# Altium PCB BLDC_Motor Controller.PcbDoc
Units mm, origin at the board's own origin, x right, y up, seen from the top; angles counter-clockwise.
Board outline 100 x 75 mm, 4 copper layers (F.Cu, In1.Cu, In2.Cu, B.Cu); 179 components, 160 nets, 651 pads, 138 vias.
Unrouted connection lines stored in the file: 403.
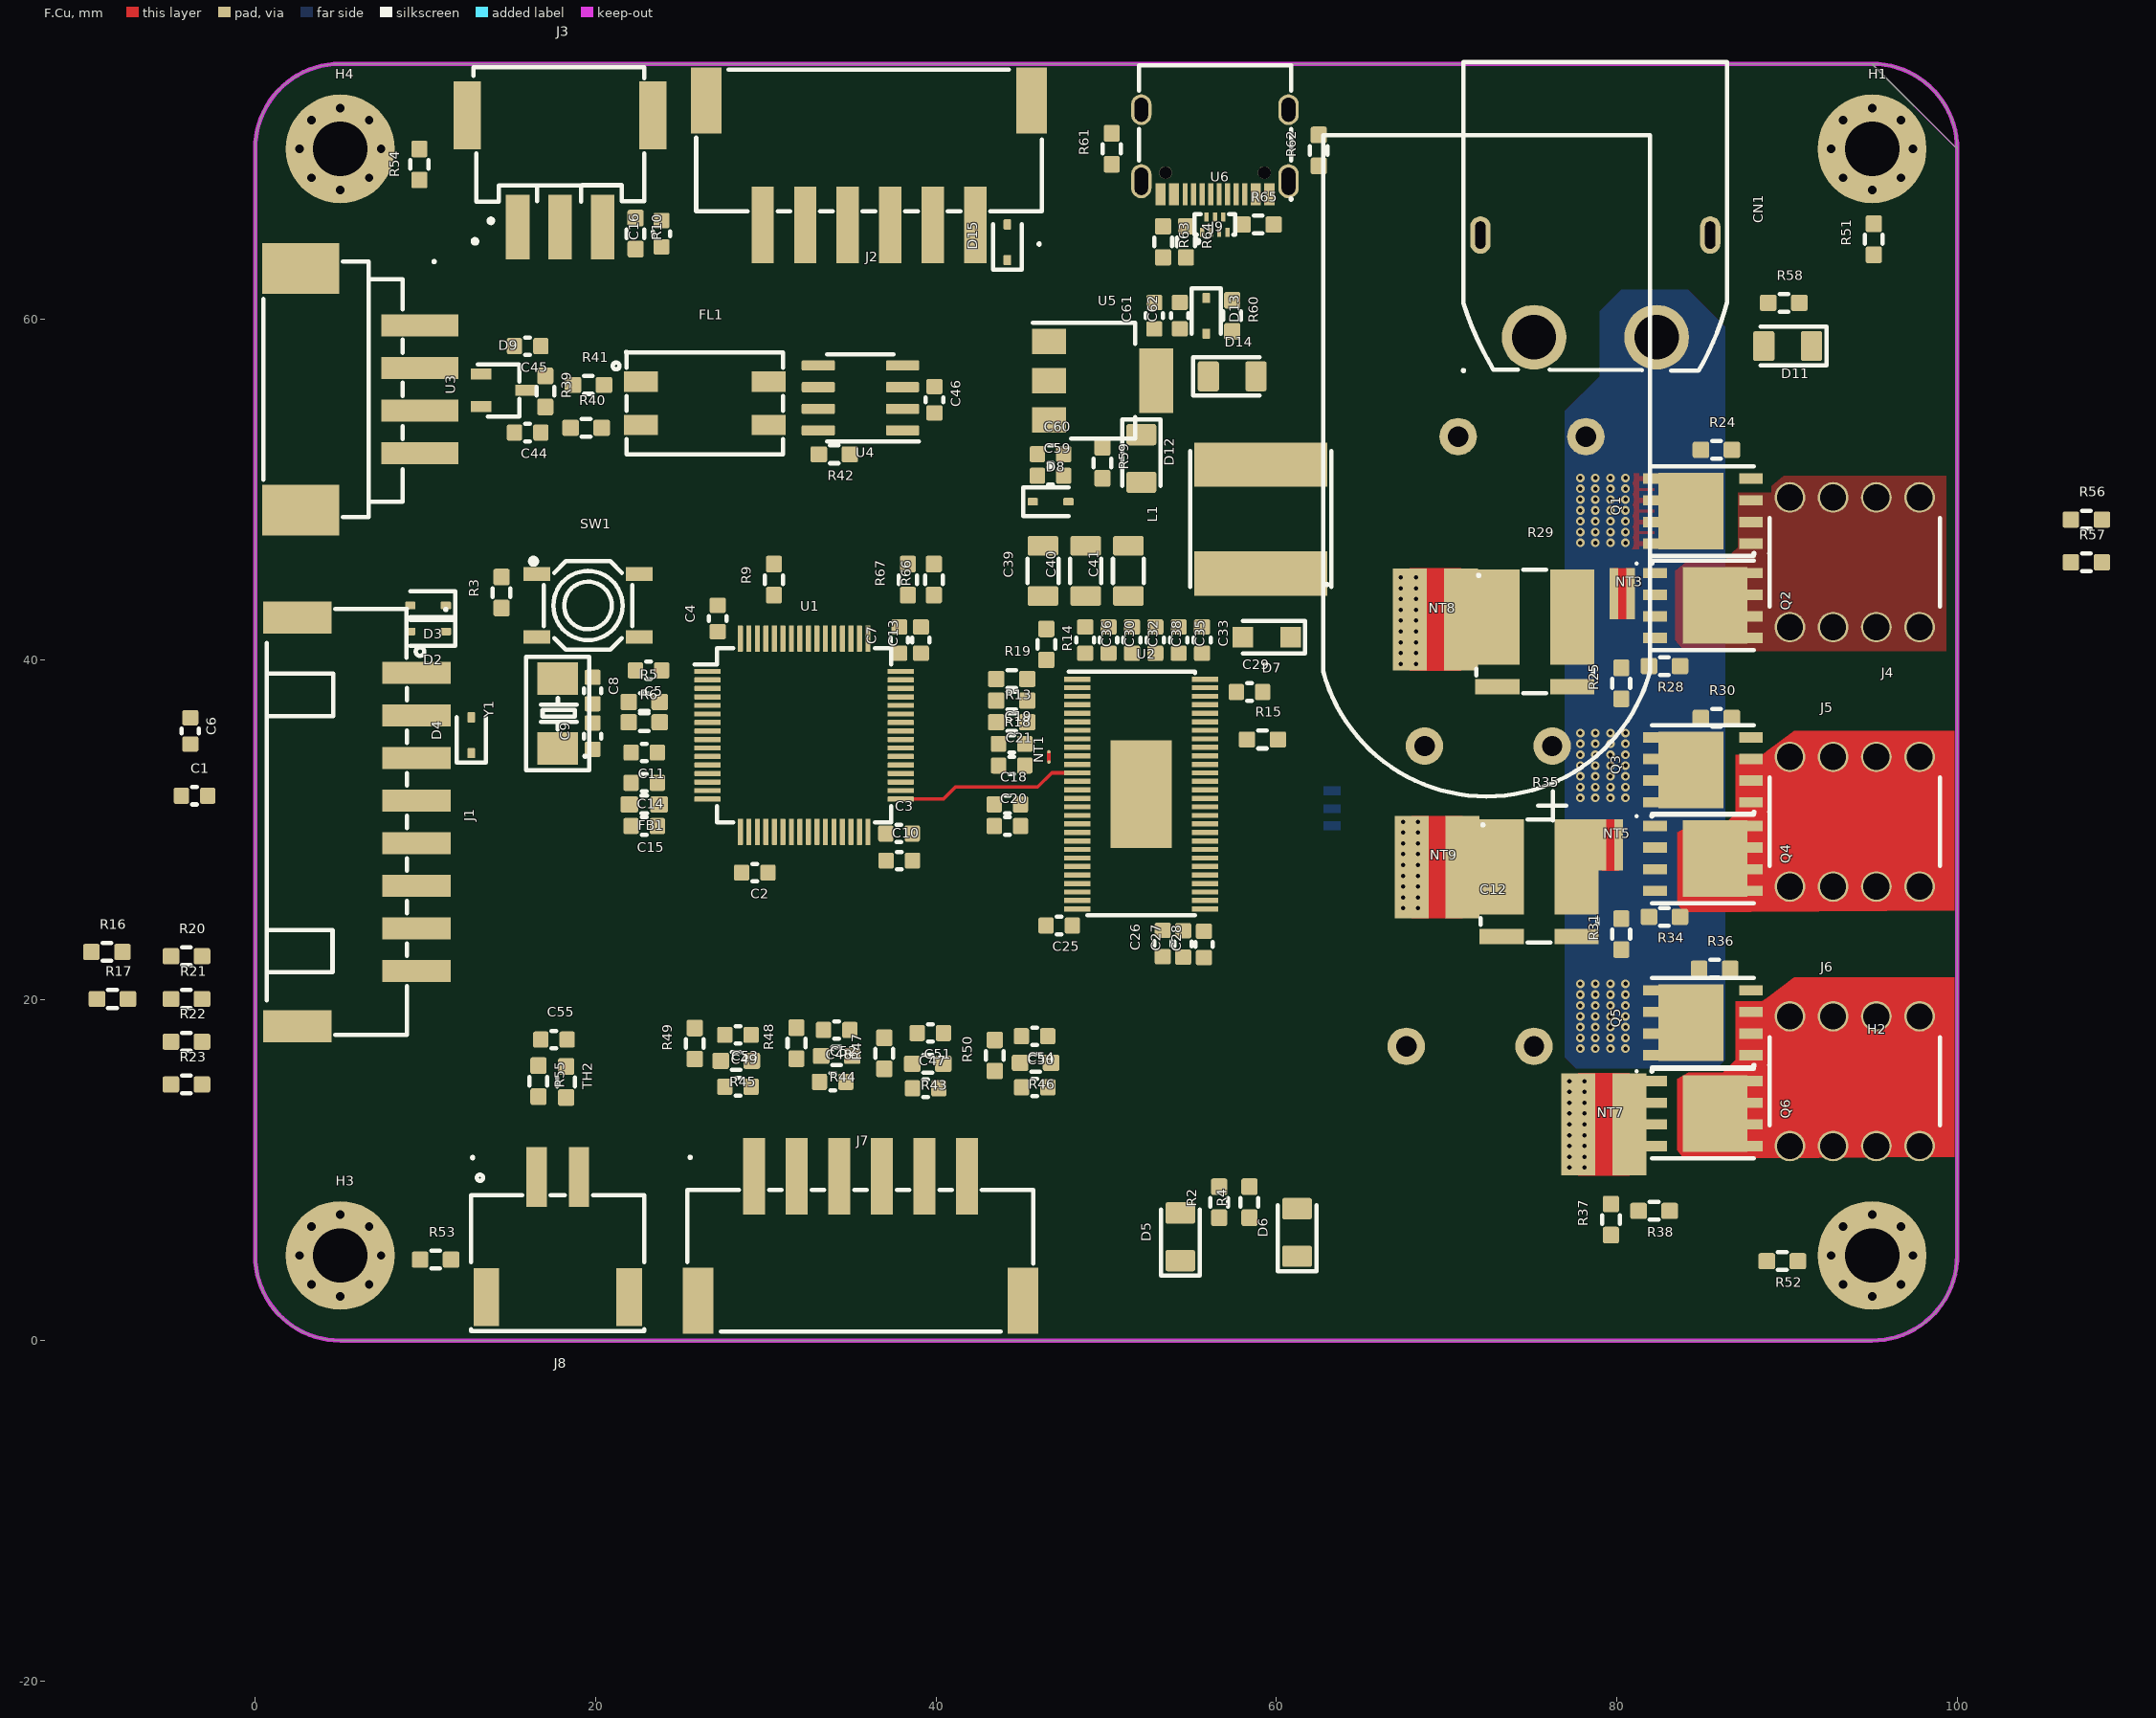
[diagram p0: F.Cu view]
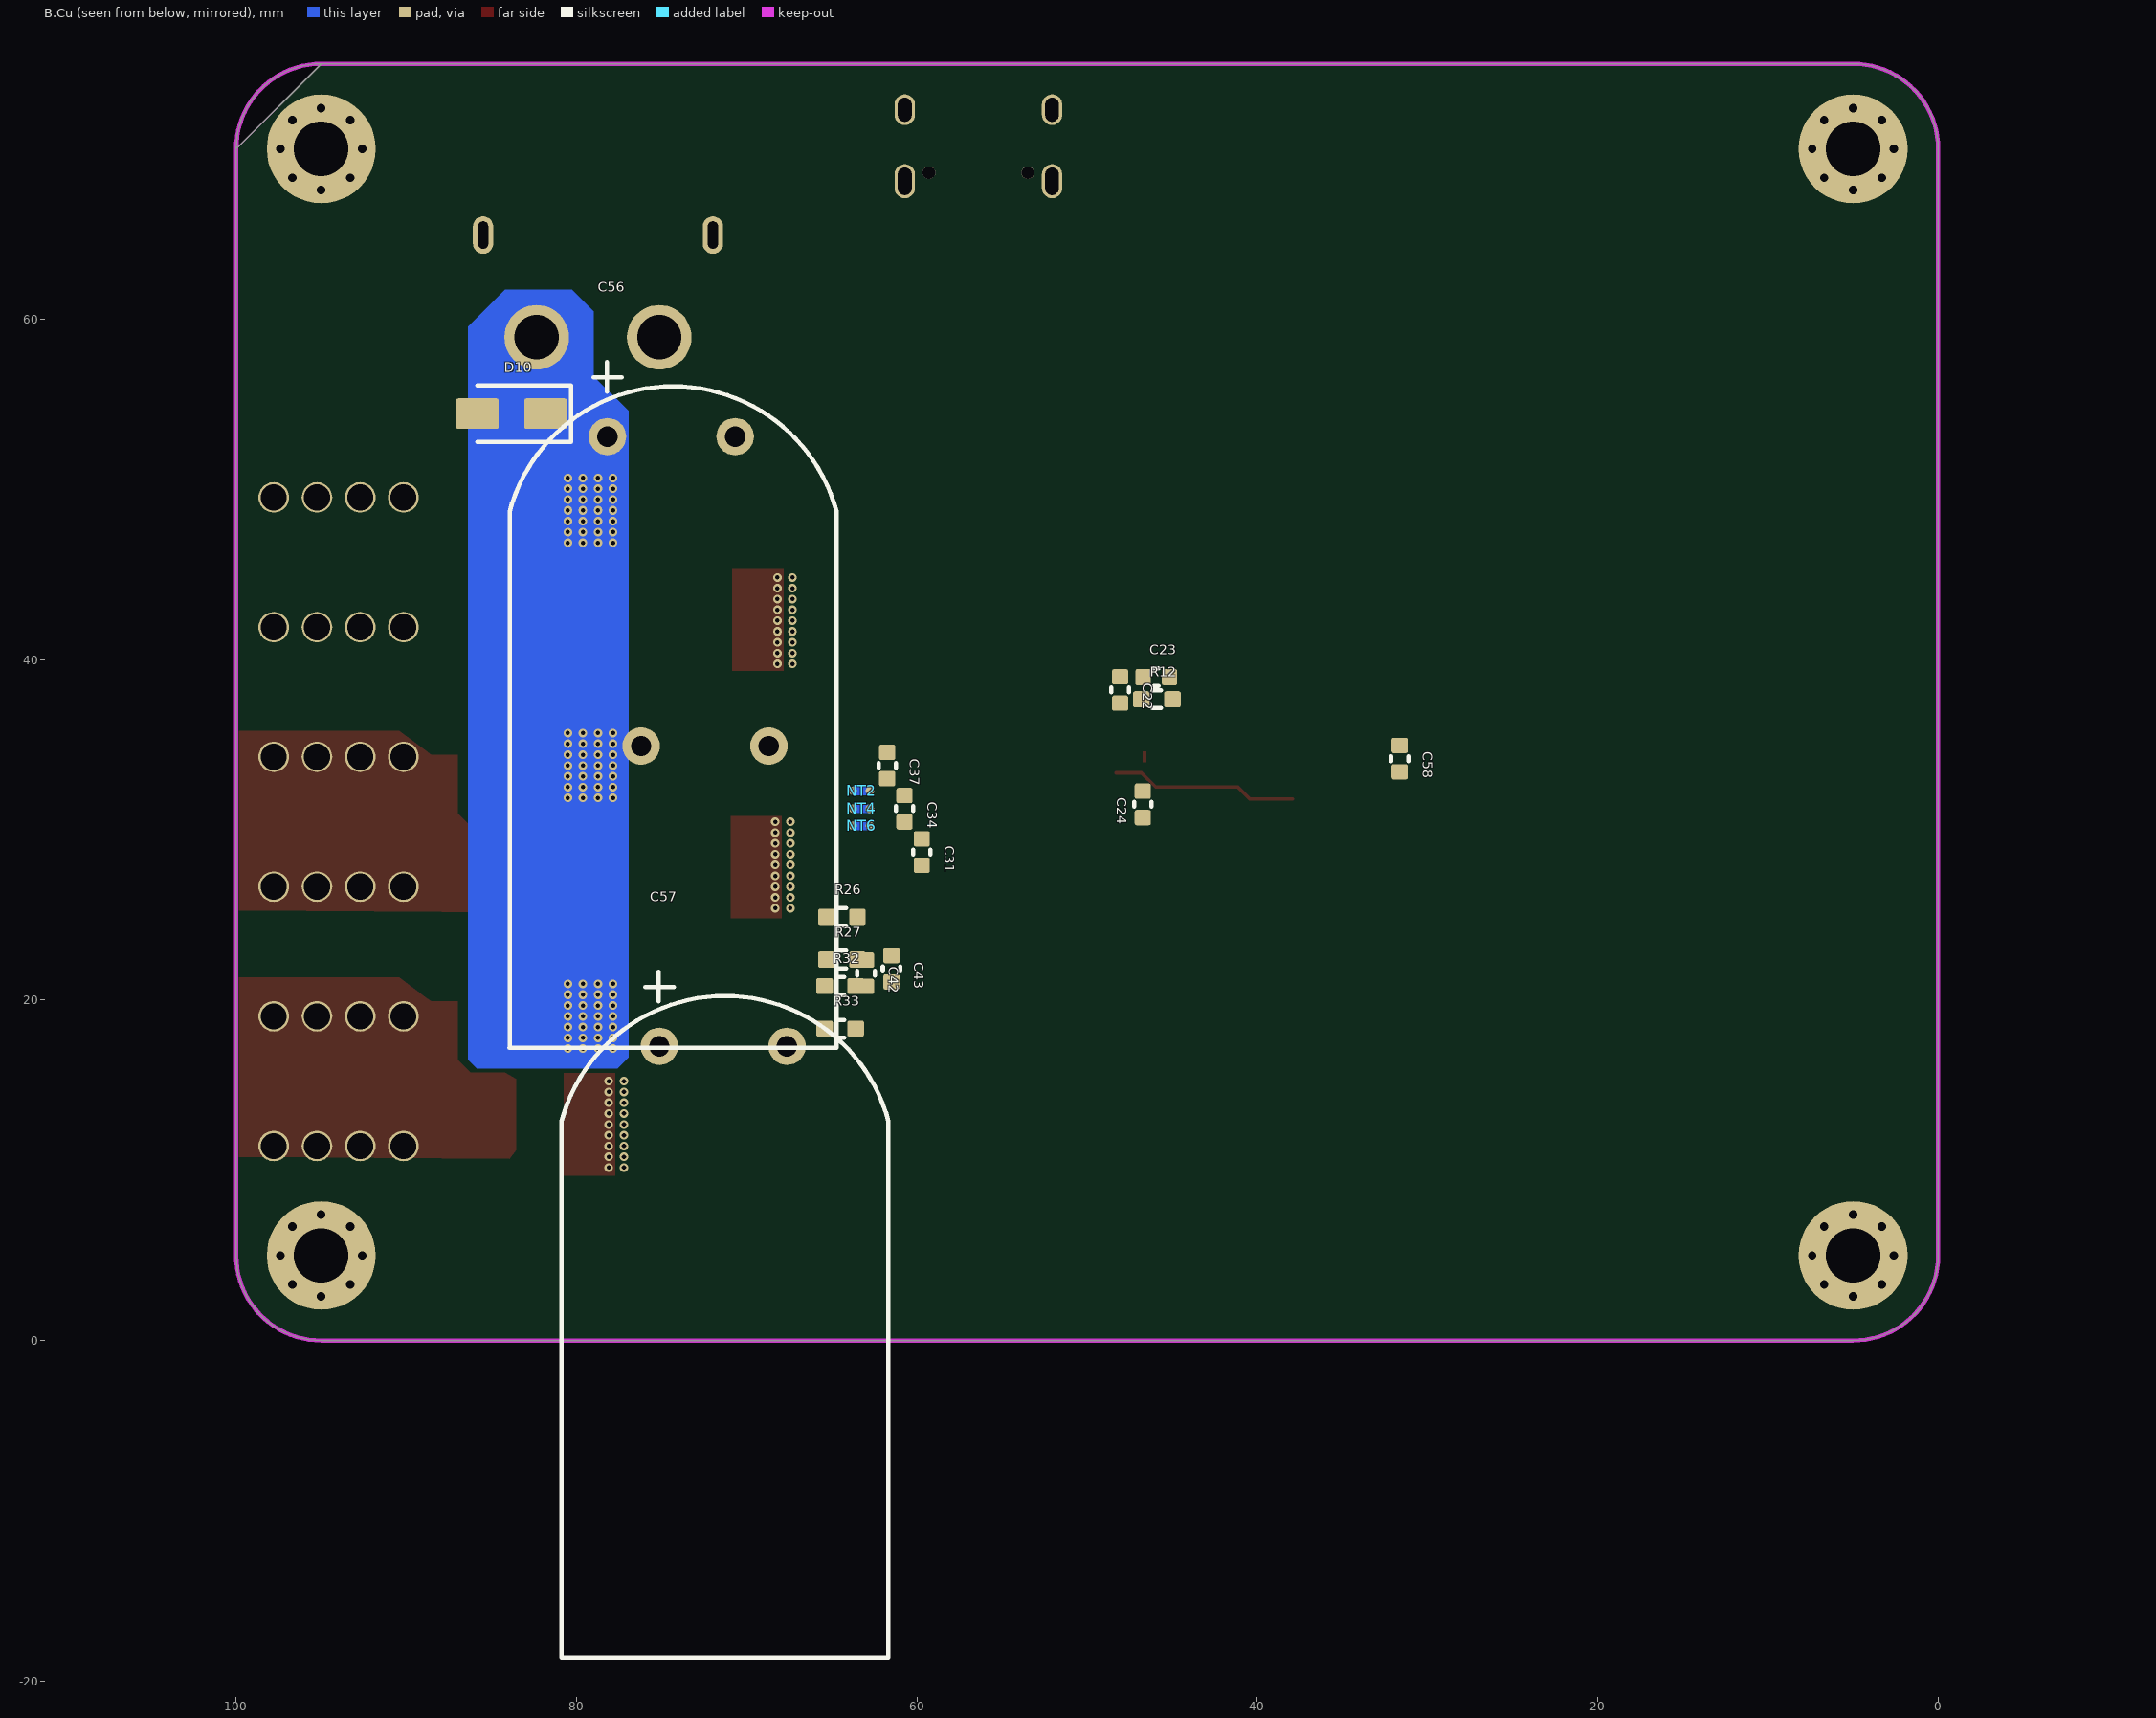
[diagram p1: B.Cu view, seen from below]

## Layer stack, top to bottom
F.Mask: solder mask 0.0102, Solder Resist, Dk 3.5
F.Cu: signal copper 0.0356
Dielectric 1: dielectric 0.32, FR-4, Dk 4.8
In1.Cu: signal copper 0.0356
Dielectric2: dielectric 0.32, FR-4, Dk 4.8
In2.Cu: signal copper 0.0356
Dielectric3: dielectric 0.32, FR-4, Dk 4.8
B.Cu: signal copper 0.0356
B.Mask: solder mask 0.0102, Solder Resist, Dk 3.5

## Board outline
95,75 cw(c95,70) 100,70 100,5 cw(c95,5) 95,0 5,0 cw(c5,5) 0,5 0,70 cw(c5,70) 5,75 95,75 cw(c95,70) 95,75

## Design rules (kind name [scope] priority, off if disabled: settings)
Clearance "Clearence 0.508_Polygon" [InNamedPolygon('F.Cu-/MOSFETS/PHASE_1')] p1: gap=0.508 ignorepadtopadclearanceinfootprint=FALSE
Clearance "Clearence 0.254_Polygon" [InNamedPolygon('F.Cu-+VDC')] p2: gap=0.254 ignorepadtopadclearanceinfootprint=FALSE
MinimumSolderMaskSliver [All] p1: minsoldermaskwidth=0
PolygonConnect Polygon_F.Cu-+VDC_ConnectDirect [IsNamedPolygon('F.Cu-+VDC') vs IsVia] p1: connectstyle=Direct reliefconductorwidth=0.254 reliefentries=4 polygonreliefangle="90 Angle" airgapwidth=0.254
PolygonConnect Polygon_F.Cu-+VDC_ConnectRelief45 [IsNamedPolygon('F.Cu-+VDC') vs (IsThruPin or IsSMTPin) and (PadShape_AllLayers = 'Round')] p2: connectstyle=Relief reliefconductorwidth=0.254 reliefentries=4 polygonreliefangle="45 Angle" airgapwidth=0.254
PolygonConnect Polygon_F.Cu-+VDC_ConnectRelief90 [IsNamedPolygon('F.Cu-+VDC') vs (IsThruPin or IsSMTPin) and (PadShape_AllLayers <> 'Round')] p3: connectstyle=Relief reliefconductorwidth=0.254 reliefentries=4 polygonreliefangle="90 Angle" airgapwidth=0.254
PolygonConnect Polygon_F.Cu-/MOSFETS/PHASE_1_ConnectDirect [IsNamedPolygon('F.Cu-/MOSFETS/PHASE_1')] p4: connectstyle=Direct reliefconductorwidth=0.254 reliefentries=4 polygonreliefangle="90 Angle" airgapwidth=0.254
RoutingVias [All] p1: holewidth=0.711 width=1.27 viastyle="Through Hole" minholewidth=0.711 minwidth=1.27 maxholewidth=0.711 maxwidth=1.27
SilkToSilkClearance [All] p1: silktosilkclearance=0
SilkToSolderMaskClearance [IsPad] p1: minsilkscreentomaskgap=0 clearancetoexposedcopper=TRUE
SolderMaskExpansion [All] p1: expansion=0.102 istentingtop=FALSE
Width [All] p1: maxlimit=10 minlimit=0.254 preferedwidth=0.254 midlayer1_maxwidth=0.254 midlayer2_maxwidth=0.254 minimp=50.000000 maximp=50.000000 favimp=50.000000
27 further rules are at their usual default settings.

## Components (designator, comment, footprint, x,y, rotation, side; value= is the part's Value field where it differs from the comment)
C1 "10u" C_0603_1608Metric#1 -3.556,32.004 r0 top
C2 "100nF" C_0603_1608Metric#1 29.357,27.488 r180 top
C3 "100nF" C_0603_1608Metric#1 37.832,29.784 r0 top
C4 "100nF" C_0603_1608Metric#1 27.178,42.418 r90 top
C5 "100nF" C_0603_1608Metric#1 23.114,39.37 r180 top
C6 "100nF" C_0603_1608Metric#1 -3.81,35.814 r270 top
C7 "100nF" C_0603_1608Metric#1 37.846,41.148 r90 top
C8 "10p" C_0603_1608Metric#1 19.83,38.183 r270 top
C9 "10p" C_0603_1608Metric#1 19.83,35.508 r90 top
C10 "2u2" C_0603_1608Metric#1 37.846,28.194 r0 top
C11 "100nF" C_0603_1608Metric#1 22.86,34.544 r180 top
C12 "LKMI2501K821MF" CAP-TH_BD18.0-P7.50-D1.2-SIDE#1 74.351,34.811 r180 top
C13 "2u2" C_0603_1608Metric#1 39.116,41.148 r90 top
C14 "100n" C_0603_1608Metric#1 22.86,32.766 r180 top
C15 "1u" C_0603_1608Metric#1 22.86,30.226 r180 top
C16 "100n" C_0603_1608Metric#1 23.876,65.024 r90 top
C18 "2u2" C_0603_1608Metric#1 44.196,31.496 r0 top
C19 "2u2" C_0603_1608Metric#1 44.45,35.052 r0 top
C20 "2u2" C_0603_1608Metric#1 44.196,30.226 r0 top
C21 "2u2" C_0603_1608Metric#1 44.45,33.782 r0 top
C22 "10n" C_0603_1608Metric#2 48.066,38.216 r90 bottom
C23 "120p" C_0603_1608Metric#2 45.939,38.97 r0 bottom
C24 "22n" C_0603_1608Metric#2 46.736,31.496 r270 bottom
C25 "2u2" C_0603_1608Metric#1 47.244,24.384 r180 top
C26 "100n" C_0603_1608Metric#1 53.328,23.323 r90 top
C27 "100n" C_0603_1608Metric#1 54.526,23.298 r90 top
C28 "100n" C_0603_1608Metric#1 55.745,23.274 r90 top
C29 "100n" C_0603_1608Metric#1 58.42,38.1 r0 top
C30 "1u" C_0603_1608Metric#1 50.142,41.148 r270 top
C31 "100n" C_0603_1608Metric#2 59.716,28.702 r90 bottom
C32 "1u" C_0603_1608Metric#1 51.516,41.148 r270 top
C33 "1u" C_0603_1608Metric#1 55.637,41.148 r270 top
C34 "100n" C_0603_1608Metric#2 60.732,31.242 r90 bottom
C35 "1u" C_0603_1608Metric#1 54.263,41.148 r270 top
C36 "1u" C_0603_1608Metric#1 48.768,41.148 r270 top
C37 "100n" C_0603_1608Metric#2 61.748,33.782 r90 bottom
C38 "1u" C_0603_1608Metric#1 52.889,41.148 r270 top
C39 "10u" C_1206_3216Metric 46.288,45.212 r90 top
C40 "10u" C_1206_3216Metric 48.798,45.212 r90 top
C41 "10u" C_1206_3216Metric 51.308,45.212 r90 top
C42 "2n2" C_0603_1608Metric#2 62.992,21.577 r90 bottom
C43 "2n2" C_0603_1608Metric#2 61.498,21.844 r90 bottom
C44 "51p" C_0603_1608Metric#1 16.015,53.34 r180 top
C45 "51p" C_0603_1608Metric#1 16.015,58.42 r180 top
C46 "2u2" C_0603_1608Metric#1 39.915,55.266 r270 top
C47 "4n7" C_0603_1608Metric#1 39.397,14.82 r0 top
C48 "4n7" C_0603_1608Metric#1 33.928,15.196 r0 top
C49 "4n7" C_0603_1608Metric#1 28.37,14.909 r0 top
C50 "4n7" C_0603_1608Metric#1 45.805,14.874 r0 top
C51 "100n" C_0603_1608Metric#1 39.671,18.067 r180 top
C52 "100n" C_0603_1608Metric#1 34.169,18.244 r180 top
C53 "100n" C_0603_1608Metric#1 28.37,17.957 r180 top
C54 "100n" C_0603_1608Metric#1 45.793,17.88 r180 top
C55 "100n" C_0603_1608Metric#1 17.558,17.682 r0 top
C56 "LKMI2501K821MF" CAP-TH_BD18.0-P7.50-D1.2-SIDE#2 76.327,53.213 r0 bottom
C57 "LKMI2501K821MF" CAP-TH_BD18.0-P7.50-D1.2-SIDE#2 73.279,17.399 r0 bottom
C58 "100n" C_0603_1608Metric#2 31.639,34.187 r90 bottom
C59 "1u" C_0603_1608Metric#1 46.736,50.8 r0 top
C60 "1u" C_0603_1608Metric#1 46.736,52.07 r0 top
C61 "1u" C_0603_1608Metric#1 52.832,60.198 r90 top
C62 "1u" C_0603_1608Metric#1 54.326,60.211 r90 top
CN1 "XT60PW-M" CONN-TH_XT60PW-M 78.74,66.04 r270 top
D2 "SD05_SOD323" D_SOD-323 10.16,41.656 r180 top
D3 "BAT60A" D_SOD-323 10.16,43.18 r180 top
D4 "BAT60A" D_SOD-323 12.7,35.56 r90 top
D5 "LED_G" LED_1206_3216Metric 54.356,6.096 r90 top
D6 "LED_R" LED_1206_3216Metric 61.214,6.35 r90 top
D7 "PMEG6020ELR" Nexperia_CFP3_SOD-123W 59.436,41.317 r180 top
D8 "BAT60A" D_SOD-323 46.736,49.276 r0 top
D9 "ESDCAN24-2BLY" TSOT-23 14.582,55.819 r0 top
D10 "SMAJ60CA" D_SMA 83.82,54.448 r180 bottom
D11 "LED_G" LED_1206_3216Metric 90.04,58.42 r180 top
D12 "LED_G" LED_1206_3216Metric 52.07,51.816 r270 top
D13 "BAT60A" D_SOD-323 55.88,60.198 r270 top
D14 "LED_G" LED_1206_3216Metric 57.404,56.642 r0 top
D15 "BAT60A" D_SOD-323 44.196,64.516 r90 top
FB1 "FerriteBead" L_0603_1608Metric_Pad1.05x0.95mm_HandSolder 22.86,31.496 r180 top
FL1 "744227S" FILTER-SMD_4P-L9.2-W6.0-P2.54-TL 26.412,55.052 r0 top
H1 "MountingHole_Pad" MountingHole_3.2mm_M3_Pad_Via 95,70 r0 top
H2 "MountingHole_Pad" MountingHole_3.2mm_M3_Pad_Via 95,5 r0 top
H3 "MountingHole_Pad" MountingHole_3.2mm_M3_Pad_Via 5,5 r0 top
H4 "MountingHole_Pad" MountingHole_3.2mm_M3_Pad_Via 5,70 r0 top
J1 "Conn_01x08" CONN-SMD_8P-P2.50_HX25003-8AWB 5.08,30.48 r270 top
J2 "Conn_01x06" CONN-SMD_S6B-XH-SM4-TB-LF-SN 36.068,70.104 r180 top
J3 "Conn_01x03" CONN-SMD_XH-3AWB 17.918,70.104 r0 top
J4 "7461084" WE_7461084 93.98,45.72 r180 top
J5 "7461084" WE_7461084 93.98,30.48 r0 top
J6 "7461084" WE_7461084 93.98,15.24 r0 top
J7 "Conn_01x06" CONN-SMD_S6B-XH-SM4-TB-LF-SN 35.56,5.08 r0 top
J8 "XH-2PWBPZ" CONN-SMD_XH-2PWBPZ 17.78,5.08 r180 top
J9 "TYPE-C-31-M-12" USB-C_SMD-TYPE-C-31-M-12 56.388,71.12 r180 top
L1 "22u" IND-SMD_L7.8-W7.8_SDR0805 59.08,48.26 r90 top
NT1 "NetTie_2" NetTie_SMD_Pad_0.2mm 46.736,34.29 r90 top
NT2 "NetTie_2" NetTie-2_SMD_Pad0.5mm 63.272,32.3 r180 bottom
NT3 "NetTie_2" NetTie_SMD_Pad_3.00mm 80.324,43.877 r0 top
NT4 "NetTie_2" NetTie-2_SMD_Pad0.5mm 63.272,31.242 r180 bottom
NT5 "NetTie_2" NetTie_SMD_Pad_3.00mm 79.617,29.109 r0 top
NT6 "NetTie_2" NetTie-2_SMD_Pad0.5mm 63.272,30.247 r180 bottom
NT7 "Net_Tie_PWR" NetTie_SMD_Pad_6.00mm 79.248,12.7 r0 top
NT8 "Net_Tie_PWR" NetTie_SMD_Pad_6.00mm 69.341,42.355 r0 top
NT9 "Net_Tie_PWR" NetTie_SMD_Pad_6.00mm 69.443,27.817 r0 top
Q1 "HSBA15810C" PQFN-8_L6.0-W5.0-P1.27-LS6.0-BL 85.065,48.724 r90 top
Q2 "HSBA15810C" PQFN-8_L6.0-W5.0-P1.27-LS6.0-BL 85.065,43.18 r270 top
Q3 "HSBA15810C" PQFN-8_L6.0-W5.0-P1.27-LS6.0-BL 85.065,33.528 r90 top
Q4 "HSBA15810C" PQFN-8_L6.0-W5.0-P1.27-LS6.0-BL 85.065,28.321 r270 top
Q5 "HSBA15810C" PQFN-8_L6.0-W5.0-P1.27-LS6.0-BL 85.065,18.669 r90 top
Q6 "HSBA15810C" PQFN-8_L6.0-W5.0-P1.27-LS6.0-BL 85.065,13.335 r270 top
R2 "1k" R_0603_1608Metric_Pad0.98x0.95mm_HandSolder#1 56.642,8.128 r90 top
R3 "2k2" R_0603_1608Metric_Pad0.98x0.95mm_HandSolder#1 14.478,43.942 r90 top
R4 "1k" R_0603_1608Metric_Pad0.98x0.95mm_HandSolder#1 58.42,8.128 r90 top
R5 "0R" R_0603_1608Metric_Pad0.98x0.95mm_HandSolder#1 22.86,37.511 r0 top
R6 "0R" R_0603_1608Metric_Pad0.98x0.95mm_HandSolder#1 22.86,36.322 r0 top
R9 "100R" R_0603_1608Metric_Pad0.98x0.95mm_HandSolder#1 30.48,44.704 r90 top
R10 "2k2" R_0603_1608Metric_Pad0.98x0.95mm_HandSolder#1 22.352,65.024 r270 top
R12 "16k" R_0603_1608Metric_Pad0.98x0.95mm_HandSolder#2 45.905,37.67 r0 bottom
R13 "10k" R_0603_1608Metric_Pad0.98x0.95mm_HandSolder#1 44.45,36.322 r0 top
R14 "205K" R_0603_1608Metric_Pad0.98x0.95mm_HandSolder#1 46.482,40.894 r270 top
R15 "1M" R_0603_1608Metric_Pad0.98x0.95mm_HandSolder#1 59.182,35.306 r0 top
R16 "39k" R_0603_1608Metric_Pad0.98x0.95mm_HandSolder#1 -8.707,22.83 r0 top
R17 "2K2" R_0603_1608Metric_Pad0.98x0.95mm_HandSolder#1 -8.382,20.066 r0 top
R18 "18K" R_0603_1608Metric_Pad0.98x0.95mm_HandSolder#1 44.45,37.592 r180 top
R19 "3K3" R_0603_1608Metric_Pad0.98x0.95mm_HandSolder#1 44.45,38.862 r0 top
R20 "39k" R_0603_1608Metric_Pad0.98x0.95mm_HandSolder#1 -4.032,22.576 r0 top
R21 "2K2" R_0603_1608Metric_Pad0.98x0.95mm_HandSolder#1 -4.032,20.066 r0 top
R22 "39k" R_0603_1608Metric_Pad0.98x0.95mm_HandSolder#1 -4.032,17.556 r0 top
R23 "2K2" R_0603_1608Metric_Pad0.98x0.95mm_HandSolder#1 -4.032,15.046 r0 top
R24 "4R7" R_0603_1608Metric_Pad0.98x0.95mm_HandSolder#1 85.852,52.324 r0 top
R25 "4R7" R_0603_1608Metric_Pad0.98x0.95mm_HandSolder#1 80.264,38.608 r90 top
R26 "100R" R_0603_1608Metric_Pad0.98x0.95mm_HandSolder#2 64.413,24.892 r0 bottom
R27 "100R" R_0603_1608Metric_Pad0.98x0.95mm_HandSolder#2 64.413,22.382 r0 bottom
R28 "39K" R_0603_1608Metric_Pad0.98x0.95mm_HandSolder#1 82.804,39.624 r180 top
R29 "0R001" RES-SMD_L7.0-W6.7 75.184,41.656 r0 top
R30 "4R7" R_0603_1608Metric_Pad0.98x0.95mm_HandSolder#1 85.852,36.576 r0 top
R31 "4R7" R_0603_1608Metric_Pad0.98x0.95mm_HandSolder#1 80.264,23.876 r90 top
R32 "100R" R_0603_1608Metric_Pad0.98x0.95mm_HandSolder#2 64.516,20.828 r0 bottom
R33 "100R" R_0603_1608Metric_Pad0.98x0.95mm_HandSolder#2 64.516,18.318 r0 bottom
R34 "39K" R_0603_1608Metric_Pad0.98x0.95mm_HandSolder#1 82.804,24.892 r180 top
R35 "0R001" RES-SMD_L7.0-W6.7 75.432,26.996 r0 top
R36 "4R7" R_0603_1608Metric_Pad0.98x0.95mm_HandSolder#1 85.749,21.844 r0 top
R37 "4R7" R_0603_1608Metric_Pad0.98x0.95mm_HandSolder#1 79.653,7.112 r90 top
R38 "39K" R_0603_1608Metric_Pad0.98x0.95mm_HandSolder#1 82.193,7.62 r180 top
R39 "120R" R_0603_1608Metric_Pad0.98x0.95mm_HandSolder#1 17.05,55.757 r270 top
R40 "10R" R_0603_1608Metric_Pad0.98x0.95mm_HandSolder#1 19.446,53.617 r0 top
R41 "10R" R_0603_1608Metric_Pad0.98x0.95mm_HandSolder#1 19.583,56.136 r0 top
R42 "10K" R_0603_1608Metric_Pad0.98x0.95mm_HandSolder#1 34.028,52.06 r180 top
R43 "2k2" R_0603_1608Metric_Pad0.98x0.95mm_HandSolder#1 39.521,16.256 r180 top
R44 "2k2" R_0603_1608Metric_Pad0.98x0.95mm_HandSolder#1 34.169,16.72 r180 top
R45 "2k2" R_0603_1608Metric_Pad0.98x0.95mm_HandSolder#1 28.267,16.433 r180 top
R46 "10k" R_0603_1608Metric_Pad0.98x0.95mm_HandSolder#1 45.853,16.313 r180 top
R47 "10k" R_0603_1608Metric_Pad0.98x0.95mm_HandSolder#1 36.966,16.874 r90 top
R48 "10k" R_0603_1608Metric_Pad0.98x0.95mm_HandSolder#1 31.806,17.471 r90 top
R49 "10k" R_0603_1608Metric_Pad0.98x0.95mm_HandSolder#1 25.83,17.449 r90 top
R50 "0R" R_0603_1608Metric_Pad0.98x0.95mm_HandSolder#1 43.453,16.745 r90 top
R51 "0R" R_0603_1608Metric_Pad0.98x0.95mm_HandSolder#1 95.1,64.695 r90 top
R52 "0R" R_0603_1608Metric_Pad0.98x0.95mm_HandSolder#1 89.724,4.669 r180 top
R53 "0R" R_0603_1608Metric_Pad0.98x0.95mm_HandSolder#1 10.604,4.753 r0 top
R54 "0R" R_0603_1608Metric_Pad0.98x0.95mm_HandSolder#1 9.652,69.088 r90 top
R55 "2k2" R_0603_1608Metric_Pad0.98x0.95mm_HandSolder#1 16.646,15.24 r270 top
R56 "39k" R_0603_1608Metric_Pad0.98x0.95mm_HandSolder#1 107.593,48.23 r0 top
R57 "2k2" R_0603_1608Metric_Pad0.98x0.95mm_HandSolder#1 107.593,45.72 r0 top
R58 "39k" R_0603_1608Metric_Pad0.98x0.95mm_HandSolder#1 89.813,60.96 r0 top
R59 "1k" R_0603_1608Metric_Pad0.98x0.95mm_HandSolder#1 49.784,51.562 r270 top
R60 "1k" R_0603_1608Metric_Pad0.98x0.95mm_HandSolder#1 57.404,60.198 r270 top
R61 "0R" R_0603_1608Metric_Pad0.98x0.95mm_HandSolder#1 50.327,70.008 r90 top
R62 "0R" R_0603_1608Metric_Pad0.98x0.95mm_HandSolder#1 62.495,69.914 r90 top
R63 "0R" R_0603_1608Metric_Pad0.98x0.95mm_HandSolder#1 53.34,64.54 r270 top
R64 "5K1" R_0603_1608Metric_Pad0.98x0.95mm_HandSolder#1 54.687,64.54 r270 top
R65 "5K1" R_0603_1608Metric_Pad0.98x0.95mm_HandSolder#1 58.928,65.556 r0 top
R66 "22R" R_0603_1608Metric_Pad0.98x0.95mm_HandSolder#1 39.878,44.704 r90 top
R67 "22R" R_0603_1608Metric_Pad0.98x0.95mm_HandSolder#1 38.354,44.704 r90 top
SW1 "PTS526SK15SMTR2LFS" SW-SMD_4P-L5.2-W5.2-P3.70-LS6.4 19.558,43.18 r0 top
TH2 "10k" R_0603_1608Metric_Pad0.98x0.95mm_HandSolder#1 18.273,15.191 r270 top
U1 "STM32F405RGTx" LQFP-64_10x10mm_P0.5mm 32.258,35.56 r0 top
U2 "DRV8302_DCA_56" HTSSOP-56-1EP_6.1x14mm_P0.5mm_EP3.61x6.35mm 52.056,32.1 r0 top
U3 "S4B-XH-SM4-TB-(LF)(SN)" CONN-SMD_S4B-XH-SM4-TB-LF-SN 5.08,55.88 r270 top
U4 "SN65HVD230" SOIC-8_3.9x4.9mm_P1.27mm 35.56,55.372 r180 top
U5 "AMS1117-3.3" SOT-223-3_TabPin2 49.784,56.388 r0 top
U6 "PUSB3AB6Z" XSON-7_L2.2-W1.2-P0.50-BL 56.388,65.556 r0 top
Y1 "8MHz" CRYSTAL-SMD_L5.0-W3.2 17.78,36.83 r90 top

## Footprints (in the part's own frame and the unit in brackets; to place one, negate y for a bottom-side part, rotate by r counter-clockwise, add the part's x,y. Pads: shape width x height; smd on the part's side, far side on the other; paste and mask are expansions set on the pad)
C_0603_1608Metric#1 [mm]
  rrect25% 0.9x0.95 smd mask+0: 1(-0.775,0) 2(0.775,0)
  silkscreen extent -0.14,-0.51 0.14,0.51
C_0603_1608Metric#2 [mm]
  rrect25% 0.9x0.95 smd mask+0: 1(0.775,0) 2(-0.775,0)
  silkscreen extent -0.14,-0.51 0.14,0.51
C_1206_3216Metric [mm]
  rrect22% 1.15x1.8 smd mask+0: 1(-1.475,0) 2(1.475,0)
  silkscreen extent -0.71,-0.91 0.71,0.91
CAP-TH_BD18.0-P7.50-D1.2-SIDE#1 [mm]
  round 2.2 hole 1.2 paste-2539.97 mask+0: 1(-1.856,-0.114) 2(5.644,-0.114)
  silkscreen extent -7.61,-36 11.6,4.26
CAP-TH_BD18.0-P7.50-D1.2-SIDE#2 [mm]
  round 2.2 hole 1.2 paste-2539.97 mask+0: 1(1.856,0.114) 2(-5.644,0.114)
  silkscreen extent -11.6,-4.26 7.61,36
CONN-SMD_8P-P2.50_HX25003-8AWB [mm]
  rect 1.3x4 smd mask+0: 1(-8.74,4.4) 2(-6.24,4.4) 3(-3.74,4.4) 4(-1.24,4.4) 5(1.26,4.4) 6(3.76,4.4) 7(6.26,4.4) 8(8.76,4.4)
  rect 1.9x4 smd mask+0: 9(12.01,-2.6) 10(-11.99,-2.6)
  silkscreen extent -12.51,-4.4 12.51,6.16
CONN-SMD_S4B-XH-SM4-TB-LF-SN [mm]
  rect 1.3x4.5 smd mask+0: 1(-3.75,4.6) 2(-1.25,4.6) 3(1.25,4.6) 4(3.75,4.6)
  rect 3x4.5 smd mask+0: 5(7.1,-2.4) 6(-7.1,-2.4)
  silkscreen extent -7.53,-4.6 7.5,5.47
CONN-SMD_S6B-XH-SM4-TB-LF-SN [mm]
  rect 1.3x4.5 smd mask+0: 1(-6.245,4.56) 2(-3.745,4.56) 3(-1.245,4.56) 4(1.255,4.56) 5(3.755,4.56) 6(6.255,4.56)
  rect 1.8x3.9 smd mask+0: 7(9.555,-2.74) 8(-9.545,-2.74)
  silkscreen extent -10.16,-4.56 10.16,5.72
CONN-SMD_XH-2PWBPZ [mm]
  rect 1.2x3.5 smd mask+0: 1(1.25,-4.531) 2(-1.25,-4.531)
  rect 1.5x3.4 smd mask+0: 3(-4.2,2.519) 4(4.2,2.519)
  silkscreen extent -5.08,-5.7 5.08,4.53
CONN-SMD_XH-3AWB [mm]
  rect 1.4x3.8 smd mask+0: 1(-2.5,-4.69) 2(0,-4.689) 3(2.5,-4.689)
  rect 1.6x4 smd mask+0: 4(5.45,1.877) 5(-5.45,1.867)
  silkscreen extent -5.13,-5.66 4.95,4.69
CONN-TH_XT60PW-M [mm]
  round 3.8 hole 2.6 paste-2539.97 mask+0: 1(7.1,-3.6) 2(7.1,3.6)
  rrect100% 2.2x1.2 hole 1.6 slot 0.6 at 90 deg paste-2539.97 mask+0: 3(1.1,6.75) 4(1.1,-6.75)
  silkscreen extent -9.07,-7.78 9.08,7.75
CRYSTAL-SMD_L5.0-W3.2 [mm]
  rect 1.9x2.4 smd mask+0: 1(-2.05,0) 2(2.05,0)
  silkscreen extent -3.33,-1.85 3.33,1.85
D_SMA [mm]
  rrect14% 2.5x1.8 smd mask+0: 1(2,0) 2(-2,0)
  silkscreen extent -2,-1.65 3.51,1.65
D_SOD-323 [mm]
  rrect25% 0.6x0.45 smd mask+0: 1(-1.05,0) 2(1.05,0)
  silkscreen extent -1.61,-0.85 1.05,0.85
FILTER-SMD_4P-L9.2-W6.0-P2.54-TL [mm]
  rect 2x1.2 smd mask+0: 1(-3.75,1.27) 2(-3.75,-1.27) 3(3.75,-1.27) 4(3.75,1.27)
  silkscreen extent -5.4,-3 4.6,3.03
HTSSOP-56-1EP_6.1x14mm_P0.5mm_EP3.61x6.35mm [mm]
  rect 1.55x0.3 smd mask+0: 1(-3.75,6.75) 2(-3.75,6.25) 3(-3.75,5.75) 4(-3.75,5.25) 5(-3.75,4.75) 6(-3.75,4.25) 7(-3.75,3.75) 8(-3.75,3.25) 9(-3.75,2.75) 10(-3.75,2.25) 11(-3.75,1.75) 12(-3.75,1.25) 13(-3.75,0.75) 14(-3.75,0.25) 15(-3.75,-0.25) 16(-3.75,-0.75) 17(-3.75,-1.25) 18(-3.75,-1.75) 19(-3.75,-2.25) 20(-3.75,-2.75) 21(-3.75,-3.25) 22(-3.75,-3.75) 23(-3.75,-4.25) 24(-3.75,-4.75) 25(-3.75,-5.25) 26(-3.75,-5.75) 27(-3.75,-6.25) 28(-3.75,-6.75) 29(3.75,-6.75) 30(3.75,-6.25) 31(3.75,-5.75) 32(3.75,-5.25) 33(3.75,-4.75) 34(3.75,-4.25) 35(3.75,-3.75) 36(3.75,-3.25) 37(3.75,-2.75) 38(3.75,-2.25) 39(3.75,-1.75) 40(3.75,-1.25) 41(3.75,-0.75) 42(3.75,-0.25) 43(3.75,0.25) 44(3.75,0.75) 45(3.75,1.25) 46(3.75,1.75) 47(3.75,2.25) 48(3.75,2.75) 49(3.75,3.25) 50(3.75,3.75) 51(3.75,4.25) 52(3.75,4.75) 53(3.75,5.25) 54(3.75,5.75) 55(3.75,6.25) 56(3.75,6.75)
  rect 3.61x6.35 smd paste-6.35 mask+0: 57(0,0)
  rect 0.96x1.03 on Top Paste mask-1.03: Un1(-1.203,2.54) Un2(-1.203,1.27) Un3(-1.203,0) Un4(-1.203,-1.27) Un5(-1.203,-2.54) Un6(0,2.54) Un7(0,1.27) Un8(0,0) Un9(0,-1.27) Un10(0,-2.54) Un11(1.203,2.54) Un12(1.203,1.27) Un13(1.203,0) Un14(1.203,-1.27) Un15(1.203,-2.54)
  silkscreen extent -4.25,-7.12 3.17,7.2
IND-SMD_L7.8-W7.8_SDR0805 [mm]
  rect 2.6x7.8 smd mask+0: 1(-3.2,0) 2(3.2,0)
  silkscreen extent -4,-4.15 4,4.15
L_0603_1608Metric_Pad1.05x0.95mm_HandSolder [mm]
  rrect25% 1.05x0.95 smd mask+0: 1(-0.875,0) 2(0.875,0)
  silkscreen extent -0.17,-0.51 0.17,0.51
LED_1206_3216Metric [mm]
  rrect20% 1.25x1.75 smd mask+0: 1(-1.4,0) 2(1.4,0)
  silkscreen extent -2.28,-1.13 1.6,1.13
LQFP-64_10x10mm_P0.5mm [mm]
  rrect25% 1.55x0.3 smd mask+0: 1(-5.675,3.75) 2(-5.675,3.25) 3(-5.675,2.75) 4(-5.675,2.25) 5(-5.675,1.75) 6(-5.675,1.25) 7(-5.675,0.75) 8(-5.675,0.25) 9(-5.675,-0.25) 10(-5.675,-0.75) 11(-5.675,-1.25) 12(-5.675,-1.75) 13(-5.675,-2.25) 14(-5.675,-2.75) 15(-5.675,-3.25) 16(-5.675,-3.75) 33(5.675,-3.75) 34(5.675,-3.25) 35(5.675,-2.75) 36(5.675,-2.25) 37(5.675,-1.75) 38(5.675,-1.25) 39(5.675,-0.75) 40(5.675,-0.25) 41(5.675,0.25) 42(5.675,0.75) 43(5.675,1.25) 44(5.675,1.75) 45(5.675,2.25) 46(5.675,2.75) 47(5.675,3.25) 48(5.675,3.75)
  rrect25% 0.3x1.55 smd mask+0: 17(-3.75,-5.675) 18(-3.25,-5.675) 19(-2.75,-5.675) 20(-2.25,-5.675) 21(-1.75,-5.675) 22(-1.25,-5.675) 23(-0.75,-5.675) 24(-0.25,-5.675) 25(0.25,-5.675) 26(0.75,-5.675) 27(1.25,-5.675) 28(1.75,-5.675) 29(2.25,-5.675) 30(2.75,-5.675) 31(3.25,-5.675) 32(3.75,-5.675) 49(3.75,5.675) 50(3.25,5.675) 51(2.75,5.675) 52(2.25,5.675) 53(1.75,5.675) 54(1.25,5.675) 55(0.75,5.675) 56(0.25,5.675) 57(-0.25,5.675) 58(-0.75,5.675) 59(-1.25,5.675) 60(-1.75,5.675) 61(-2.25,5.675) 62(-2.75,5.675) 63(-3.25,5.675) 64(-3.75,5.675)
  silkscreen extent -6.45,-5.11 5.11,5.11
MountingHole_3.2mm_M3_Pad_Via [mm]
  round 0.8 hole 0.5 paste-2539.97 mask+0: 1(-2.4,0) 1(-1.697,-1.697) 1(-1.697,1.697) 1(0,-2.4) 1(0,2.4) 1(1.697,-1.697) 1(1.697,1.697) 1(2.4,0)
  round 6.4 hole 3.2 paste-2539.97 mask+0: 1(0,0)
NetTie-2_SMD_Pad0.5mm [mm]
  round 0.5 smd paste-0.5 mask-0.5: 1(0.5,0) 2(-0.5,0)
  F.Cu region: -0.5,-0.25 0.5,-0.25 0.5,0.25 -0.5,0.25
NetTie_SMD_Pad_0.2mm [mm]
  round 0.2 smd paste-0.2 mask-0.2: 1(-0.3,0.1) 2(0.3,0.101)
  F.Cu region: 0.3,0 -0.3,0 -0.3,0.201 0.3,0.201
NetTie_SMD_Pad_3.00mm [mm]
  rect 0.5x3 smd paste-3 mask-3: 1(-0.5,0) 2(0.5,0)
  F.Cu region: 0.5,-1.5 -0.5,-1.5 -0.5,1.5 0.5,1.5
NetTie_SMD_Pad_6.00mm [mm]
  rect 2x6 smd paste-6 mask-6: 1(-1.5,0) 2(1.5,0)
  F.Cu region: 1.5,-3 -1.5,-3 -1.5,3 1.5,3
Nexperia_CFP3_SOD-123W [mm]
  rect 1.2x1.2 smd mask+0: 1(-1.4,0) 2(1.4,0)
  silkscreen extent -2.26,-0.95 1.4,0.95
PQFN-8_L6.0-W5.0-P1.27-LS6.0-BL [mil]
  rect 24x55 smd mask+0: 1(-75,-111) 2(-25,-111) 3(25,-111) 4(75,-111) 5(75,111) 6(25,111) 7(-25,111) 8(-75,111)
  rect 177.17x150 smd mask+0: 9(0,28)
  silkscreen extent -104,-154 104,118
R_0603_1608Metric_Pad0.98x0.95mm_HandSolder#1 [mm]
  rrect25% 0.975x0.95 smd mask+0: 1(-0.913,0) 2(0.913,0)
  silkscreen extent -0.25,-0.52 0.25,0.52
R_0603_1608Metric_Pad0.98x0.95mm_HandSolder#2 [mm]
  rrect25% 0.975x0.95 smd mask+0: 1(0.913,0) 2(-0.913,0)
  silkscreen extent -0.25,-0.52 0.25,0.52
RES-SMD_L7.0-W6.7 [mm]
  rect 2.6x0.9 smd mask+0: 1(-2.2,-3.253) 2(2.2,-3.253)
  rect 2.6x5.6 smd mask+0: 1(-2.2,0.841) 2(2.2,0.841)
  silkscreen extent -3.43,-3.62 3.43,3.62
SOIC-8_3.9x4.9mm_P1.27mm [mm]
  rrect25% 1.95x0.6 smd mask+0: 1(-2.475,1.905) 2(-2.475,0.635) 3(-2.475,-0.635) 4(-2.475,-1.905) 5(2.475,-1.905) 6(2.475,-0.635) 7(2.475,0.635) 8(2.475,1.905)
  silkscreen extent -3.45,-2.56 1.95,2.56
SOT-223-3_TabPin2 [mm]
  rect 2x1.5 smd mask+0: 1(-3.15,2.3) 2(-3.15,0) 3(-3.15,-2.3)
  rect 2x3.8 smd mask+0: 2(3.15,0)
  silkscreen extent -4.1,-3.41 1.91,3.41
SW-SMD_4P-L5.2-W5.2-P3.70-LS6.4 [mm]
  rect 1.58x0.8 smd mask+0: 1(-3,1.85) 2(3,1.85) 3(-3,-1.85) 4(3,-1.85)
  silkscreen extent -3.4,-2.6 2.6,2.8
TSOT-23 [mm]
  rect 1.22x0.65 smd mask+0: 1(-1.31,0.95) 2(-1.31,-0.95) 3(1.31,0)
  silkscreen extent -1.5,-1.55 0.95,1.51
USB-C_SMD-TYPE-C-31-M-12 [mm]
  rect 0.3x1.3 smd mask+0: A1(-3.351,3.784) A4(-2.551,3.784) A5(-1.251,3.784) A6(-0.251,3.784) A7(0.249,3.784) A8(1.249,3.784) A9(2.549,3.784) A12(3.349,3.784) B1(3.049,3.784) B4(2.249,3.784) B5(1.749,3.784) B6(0.749,3.784) B7(-0.751,3.784) B8(-1.751,3.784) B9(-2.251,3.784) B12(-3.051,3.784)
  rrect100% 1.2x2 hole 1.6 slot 0.8 at 0 deg paste-2539.97 mask+0: S1(-4.326,3.016) S2(4.324,3.016)
  rrect100% 1.2x1.8 hole 1.4 slot 0.8 at 0 deg paste-2539.97 mask+0: S1(-4.326,-1.184) S2(4.324,-1.184)
  round 0.75 hole 0.75 paste-2539.97 mask+0: Un1(-2.901,2.516) Un2(2.899,2.516)
  silkscreen extent -4.51,-3.78 4.47,4.1
WE_7461084 [mm]
  round 1.8 hole 1.525 paste-2539.97 mask+0.102: 1(-3.81,3.81) 1(-3.81,-3.81) 1(-1.27,3.81) 1(-1.27,-3.81) 1(1.27,3.81) 1(1.27,-3.81) 1(3.81,3.81) 1(3.81,-3.81)
  silkscreen extent -5,-2.59 5,2.59
XSON-7_L2.2-W1.2-P0.50-BL [mm]
  rect 0.25x0.53 smd mask+0: 1(-0.75,-0.45) 2(-0.25,-0.45) 3(0.25,-0.45) 4(0.75,-0.45) 5(0.5,0.45) 6(0,0.45) 7(-0.5,0.45)
  silkscreen extent -1.2,-1.09 1.2,0.6

## Part data
C1 C2 C3 C4 C5 C6 C7 C8 C9 C10 C11 C13 C14 C15 C16 C18 C19 C20 C21 C22 C23 C24 C25 C26 C27 C28 C29 C30 C31 C32 C33 C34 C35 C36 C37 C38 C42 C43 C44 C45 C46 C47 C48 C49 C50 C51 C52 C53 C54 C55 C58 C59 C60 C61 C62: library part C_0603_1608Metric, "Capacitor SMD 0603 (1608 Metric), square (rectangular) end terminal, IPC_7351 nominal, (Body size source: IPC-SM-782 page 76, https://www.pcb-3d.com/wordpress/wp-content/uploads/ipc-sm-782a_amendment_1_and_2.pdf), generated with kicad-footprint-generator", ki_description="Unpolarized capacitor", ki_keywords="cap capacitor"
  C1 C2 C3 C4 C5 C6 C7 C8 C9 C10 C11 C13 C14 C15 C16: Sheetfile=MCU.kicad_sch, Sheetname=MCU
  C18 C19 C20 C21 C22 C23 C24 C25 C26 C27 C28 C29 C30 C31 C32 C33 C34 C35 C36 C37 C38: Sheetfile="FET Driver.kicad_sch", Sheetname="FET Driver"
  C42 C43: Sheetfile=MOSFETS.kicad_sch, Sheetname=MOSFETS
  C44 C45 C46: Sheetfile="CAN BUS.kicad_sch", Sheetname="CAN BUS"
  C47 C48 C49 C50 C51 C52 C53 C54: Sheetfile=Filters.kicad_sch, Sheetname=Filters
  C55 C58: Sheetfile="INPUT PROTECTION.kicad_sch", Sheetname="INPUT PROTECTION"
  C59 C60 C61 C62: Sheetfile=STEP-DOWN.kicad_sch, Sheetname=STEP-DOWN
C12 C56 C57: library part CAP-TH_BD18.0-P7.50-D1.2-SIDE, "CAP-TH_BD18.0-P7.50-D1.2-FD footprint", Capacitance=820uF, LCSC=C443097, Sheetfile="INPUT PROTECTION.kicad_sch", Sheetname="INPUT PROTECTION", ki_keywords=C443097
C39 C40 C41: library part C_1206_3216Metric, "Capacitor SMD 1206 (3216 Metric), square (rectangular) end terminal, IPC_7351 nominal, (Body size source: IPC-SM-782 page 76, https://www.pcb-3d.com/wordpress/wp-content/uploads/ipc-sm-782a_amendment_1_and_2.pdf), generated with kicad-footprint-generator", Sheetfile="FET Driver.kicad_sch", Sheetname="FET Driver", ki_description="Unpolarized capacitor", ki_keywords="cap capacitor"
CN1: library part CONN-TH_XT60PW-M, "CONN-TH_XT60PW-M footprint", LCSC=C98732, Sheetfile="INPUT PROTECTION.kicad_sch", Sheetname="INPUT PROTECTION", ki_keywords=C98732
D2 D3 D4 D8 D13 D15: library part D_SOD-323, "SOD-323"
  D2: Sheetfile=MCU.kicad_sch, Sheetname=MCU, ki_description="5V, 450W Discrete Bidirectional TVS Diode, SOD-323", ki_keywords="transient voltage suppressor thyrector transil"
  D3 D4 D15: Sheetfile=MCU.kicad_sch, Sheetname=MCU, ki_description="10V 3A High Current Recitifier Schottky Diode, SOD-323", ki_keywords="diode Schottky"
  D8: Sheetfile="FET Driver.kicad_sch", Sheetname="FET Driver", ki_description="10V 3A High Current Recitifier Schottky Diode, SOD-323", ki_keywords="diode Schottky"
  D13: Sheetfile=STEP-DOWN.kicad_sch, Sheetname=STEP-DOWN, ki_description="10V 3A High Current Recitifier Schottky Diode, SOD-323", ki_keywords="diode Schottky"
D5 D6 D11 D12 D14: library part LED_1206_3216Metric, "LED SMD 1206 (3216 Metric), square (rectangular) end terminal, IPC_7351 nominal, (Body size source: http://www.tortai-tech.com/upload/download/2011102023233369053.pdf), generated with kicad-footprint-generator", ki_description="Light emitting diode", ki_keywords="LED diode"
  D5 D6: Sheetfile=MCU.kicad_sch, Sheetname=MCU
  D11: Sheetfile="INPUT PROTECTION.kicad_sch", Sheetname="INPUT PROTECTION"
  D12 D14: Sheetfile=STEP-DOWN.kicad_sch, Sheetname=STEP-DOWN
D7: library part Nexperia_CFP3_SOD-123W, "Nexperia CFP3 (SOD-123W), https://assets.nexperia.com/documents/outline-drawing/SOD123W.pdf", Sheetfile="FET Driver.kicad_sch", Sheetname="FET Driver", ki_description="60V, 2A low leakage current MEGA Schottky barrier rectifier, SOD-123W", ki_keywords="ir diode"
D9: library part TSOT-23, "3-pin TSOT23 package, http://www.analog.com.tw/pdf/All_In_One.pdf", Sheetfile="CAN BUS.kicad_sch", Sheetname="CAN BUS", ki_description="Bidirectional dual transient-voltage-suppression diode, center on pin 3", ki_keywords="diode TVS thyrector"
D10: library part D_SMA, "Diode SMA (DO-214AC)", Sheetfile="INPUT PROTECTION.kicad_sch", Sheetname="INPUT PROTECTION", ki_description="400W bidirectional Transient Voltage Suppressor, 60.0Vr, SMA(DO-214AC)", ki_keywords="bidirectional diode TVS voltage suppressor"
FB1: library part L_0603_1608Metric_Pad1.05x0.95mm_HandSolder, "Inductor SMD 0603 (1608 Metric), square (rectangular) end terminal, IPC_7351 nominal with elongated pad for handsoldering. (Body size source: http://www.tortai-tech.com/upload/download/2011102023233369053.pdf), generated with kicad-footprint-generator", Sheetfile=MCU.kicad_sch, Sheetname=MCU, ki_description="Ferrite bead", ki_keywords="L ferrite bead inductor filter"
FL1: library part FILTER-SMD_4P-L9.2-W6.0-P2.54-TL, "FILTER-SMD_4P-L9.2-W6.0-P2.54-TL footprint", LCSC=C2651119, Sheetfile="CAN BUS.kicad_sch", Sheetname="CAN BUS", ki_keywords=C2651119
H1 H2 H3 H4: library part MountingHole_3.2mm_M3_Pad_Via, "Mounting Hole 3.2mm, M3", Sheetfile=Mechanical.kicad_sch, Sheetname=Mechanical, ki_description="Mounting Hole with connection", ki_keywords="mounting hole"
J1: library part CONN-SMD_8P-P2.50_HX25003-8AWB, "CONN-SMD_8P-P2.50_HX25003-8AWB footprint", Sheetfile=MCU.kicad_sch, Sheetname=MCU, ki_description="Generic connector, single row, 01x08, script generated (kicad-library-utils/schlib/autogen/connector/)", ki_keywords=connector
J2 J7: library part CONN-SMD_S6B-XH-SM4-TB-LF-SN, "CONN-SMD_S6B-XH-SM4-TB-LF-SN footprint", ki_description="Generic connector, single row, 01x06, script generated (kicad-library-utils/schlib/autogen/connector/)", ki_keywords=connector
  J2: Sheetfile=MCU.kicad_sch, Sheetname=MCU
  J7: Sheetfile=Filters.kicad_sch, Sheetname=Filters
J3: library part CONN-SMD_XH-3AWB, "CONN-SMD_XH-3AWB footprint", Sheetfile=MCU.kicad_sch, Sheetname=MCU, ki_description="Generic connector, single row, 01x03, script generated (kicad-library-utils/schlib/autogen/connector/)", ki_keywords=connector
J4 J5 J6: library part WE_7461084, Sheetfile=MOSFETS.kicad_sch, Sheetname=MOSFETS, ki_description="Generic connector, single row, 01x01, script generated (kicad-library-utils/schlib/autogen/connector/)", ki_keywords=connector
J8: library part CONN-SMD_XH-2PWBPZ, "CONN-SMD_XH-2PWBPZ footprint", Sheetfile="INPUT PROTECTION.kicad_sch", Sheetname="INPUT PROTECTION", ki_description="Generic connector, single row, 01x02, script generated (kicad-library-utils/schlib/autogen/connector/)", ki_keywords=connector
J9: library part USB-C_SMD-TYPE-C-31-M-12, "USB-C_SMD-TYPE-C-31-M-12 footprint", Sheetfile=USB.kicad_sch, Sheetname=USB, ki_description="USB 2.0-only Type-C Receptacle connector", ki_keywords="usb universal serial bus type-C USB2.0"
L1: library part IND-SMD_L7.8-W7.8_SDR0805, "IND-SMD_L7.8-W7.8_SDR0805 footprint", Sheetfile="FET Driver.kicad_sch", Sheetname="FET Driver", ki_description=Inductor, ki_keywords="inductor choke coil reactor magnetic"
NT1: library part NetTie_SMD_Pad_0.2mm, Sheetfile="FET Driver.kicad_sch", Sheetname="FET Driver", ki_description="Net tie, 2 pins", ki_keywords="net tie short"
NT2 NT4 NT6: library part NetTie-2_SMD_Pad0.5mm, "Net tie, 2 pin, 0.5mm square SMD pads", Sheetfile=MOSFETS.kicad_sch, Sheetname=MOSFETS, ki_description="Net tie, 2 pins", ki_keywords="net tie short"
NT3 NT5: library part NetTie_SMD_Pad_3.00mm, Sheetfile=MOSFETS.kicad_sch, Sheetname=MOSFETS, ki_description="Net tie, 2 pins", ki_keywords="net tie short"
NT7 NT8 NT9: library part NetTie_SMD_Pad_6.00mm, Sheetfile=MOSFETS.kicad_sch, Sheetname=MOSFETS, ki_description="Net Tie 6mm X 2mm"
Q1 Q2 Q3 Q4 Q5 Q6: library part PQFN-8_L6.0-W5.0-P1.27-LS6.0-BL, "PQFN-8_L6.0-W5.0-P1.27-LS6.0-BL footprint", LCSC=C845605, Sheetfile=MOSFETS.kicad_sch, Sheetname=MOSFETS, ki_keywords=C845605
R2 R3 R4 R5 R6 R9 R10 R12 R13 R14 R15 R16 R17 R18 R19 R20 R21 R22 R23 R24 R25 R26 R27 R28 R30 R31 R32 R33 R34 R36 R37 R38 R39 R40 R41 R42 R43 R44 R45 R46 R47 R48 R49 R50 R51 R52 R53 R54 R55 R56 R57 R58 R59 R60 R61 R62 R63 R64 R65 R66 R67 TH2: library part R_0603_1608Metric_Pad0.98x0.95mm_HandSolder, "Resistor SMD 0603 (1608 Metric), square (rectangular) end terminal, IPC_7351 nominal with elongated pad for handsoldering. (Body size source: IPC-SM-782 page 72, https://www.pcb-3d.com/wordpress/wp-content/uploads/ipc-sm-782a_amendment_1_and_2.pdf), generated with kicad-footprint-generator"
  R2 R3 R4 R5 R6 R9 R10: Sheetfile=MCU.kicad_sch, Sheetname=MCU, ki_description=Resistor, ki_keywords="R res resistor"
  R12 R13 R14 R15 R16 R17 R18 R19 R20 R21 R22 R23: Sheetfile="FET Driver.kicad_sch", Sheetname="FET Driver", ki_description=Resistor, ki_keywords="R res resistor"
  R24 R25 R26 R27 R28 R30 R31 R32 R33 R34 R36 R37 R38: Sheetfile=MOSFETS.kicad_sch, Sheetname=MOSFETS, ki_description=Resistor, ki_keywords="R res resistor"
  R39 R40 R41 R42: Sheetfile="CAN BUS.kicad_sch", Sheetname="CAN BUS", ki_description=Resistor, ki_keywords="R res resistor"
  R43 R44 R45 R46 R47 R48 R49 R50: Sheetfile=Filters.kicad_sch, Sheetname=Filters, ki_description=Resistor, ki_keywords="R res resistor"
  R51 R52 R53 R54: Sheetfile=Mechanical.kicad_sch, Sheetname=Mechanical, ki_description=Resistor, ki_keywords="R res resistor"
  R55 R56 R57 R58: Sheetfile="INPUT PROTECTION.kicad_sch", Sheetname="INPUT PROTECTION", ki_description=Resistor, ki_keywords="R res resistor"
  R59 R60: Sheetfile=STEP-DOWN.kicad_sch, Sheetname=STEP-DOWN, ki_description=Resistor, ki_keywords="R res resistor"
  R61 R62 R63 R64 R65 R66 R67: Sheetfile=USB.kicad_sch, Sheetname=USB, ki_description=Resistor, ki_keywords="R res resistor"
  TH2: Sheetfile="INPUT PROTECTION.kicad_sch", Sheetname="INPUT PROTECTION", ki_description="Temperature dependent resistor, negative temperature coefficient", ki_keywords="thermistor NTC resistor sensor RTD"
R29 R35: library part RES-SMD_L7.0-W6.7, "RES-SMD_L7.0-W6.7 footprint", Sheetfile=MOSFETS.kicad_sch, Sheetname=MOSFETS, ki_description=Resistor, ki_keywords="R res resistor"
SW1: library part SW-SMD_4P-L5.2-W5.2-P3.70-LS6.4, "SW-SMD_4P-L5.2-W5.2-P3.70-LS6.4 footprint", LCSC=C2689521, Sheetfile=MCU.kicad_sch, Sheetname=MCU, ki_keywords=C2689521
U1: library part LQFP-64_10x10mm_P0.5mm, "LQFP, 64 Pin (https://www.analog.com/media/en/technical-documentation/data-sheets/ad7606_7606-6_7606-4.pdf), generated with kicad-footprint-generator ipc_gullwing_generator.py", Sheetfile=MCU.kicad_sch, Sheetname=MCU, ki_description="STMicroelectronics Arm Cortex-M4 MCU, 1024KB flash, 192KB RAM, 168 MHz, 1.8-3.6V, 51 GPIO, LQFP64", ki_keywords="Arm Cortex-M4 STM32F4 STM32F405/415"
U2: library part HTSSOP-56-1EP_6.1x14mm_P0.5mm_EP3.61x6.35mm, "HTSSOP56: plastic thin shrink small outline package http://www.ti.com/lit/ds/symlink/drv8301.pdf", Sheetfile="FET Driver.kicad_sch", Sheetname="FET Driver"
U3: library part CONN-SMD_S4B-XH-SM4-TB-LF-SN, "CONN-SMD_S4B-XH-SM4-TB-LF-SN footprint", LCSC=C161861, Sheetfile="CAN BUS.kicad_sch", Sheetname="CAN BUS", ki_keywords=C161861
U4: library part SOIC-8_3.9x4.9mm_P1.27mm, "SOIC, 8 Pin (JEDEC MS-012AA, https://www.analog.com/media/en/package-pcb-resources/package/pkg_pdf/soic_narrow-r/r_8.pdf), generated with kicad-footprint-generator ipc_gullwing_generator.py", Sheetfile="CAN BUS.kicad_sch", Sheetname="CAN BUS", ki_description="CAN Bus Transceivers, 3.3V, 1Mbps, Low-Power capabilities, SOIC-8", ki_keywords="can transeiver ti low-power"
U5: library part SOT-223-3_TabPin2, "module CMS SOT223 4 pins", Sheetfile=STEP-DOWN.kicad_sch, Sheetname=STEP-DOWN, ki_description="1A Low Dropout regulator, positive, 3.3V fixed output, SOT-223", ki_keywords="linear regulator ldo fixed positive"
U6: library part XSON-7_L2.2-W1.2-P0.50-BL, "XSON-7_L2.2-W1.2-P0.50-BL footprint", LCSC=C553550, Sheetfile=USB.kicad_sch, Sheetname=USB, ki_keywords=C553550
Y1: library part CRYSTAL-SMD_L5.0-W3.2, "CRYSTAL-SMD_L5.0-W3.2 footprint", Sheetfile=MCU.kicad_sch, Sheetname=MCU, ki_description="Two pin crystal", ki_keywords="quartz ceramic resonator oscillator"

## Via types
v1: diameter 0.508, hole 0.254, F.Cu to B.Cu, tented both sides, 138 vias

## Nets (pads, with @x,y where several pads share a name; then routed paths per layer and width w, separated by ;. In a path a pad name is that pad's centre, name@x,y a point inside that pad or via, vN(x,y) a via of type N, cw(c..) or ccw(c..) an arc to the next point about the centre after c; other vN are vias at no path point)
+3V3: C1.1 C2.1 C3.1 C4.1 C5.1 C6.1 C7.1 C46.1 C51.1 C52.1 C53.1 C54.1 C55.1 D4.1 D13.1 D15.1 FB1.2 R43.1 R44.1 R45.1 R46.1 R55.1 R60.1 U1.1 U1.19 U1.32 U1.48 U1.64 U2.9 U2.24 U4.3
+3V3_A: C14.1 C15.1 FB1.1 U1.13
+5V: C59.1 C60.1 D3.1 D8.1 J3.1 J7.6 R59.1 R63.2 U3.4 U5.3
+5V-C: J9.A4 J9.A9 J9.B4 J9.B9 R63.1 U6.3 U6.5
+5V_DRV: C39.2 C40.2 C41.2 D8.2 L1.2 R18.2
+VDC: C12.1 C26.2 C27.2 C28.2 C30.2 C32.2 C33.2 C35.2 C36.2 C38.2 C56.1 C57.1 CN1.2 D10.2 Q1.5 Q1.6 Q1.7 Q1.8 Q1.9 Q3.5 Q3.6 Q3.7 Q3.8 Q3.9 Q5.5 Q5.6 Q5.7 Q5.8 Q5.9 R56.1 R58.1 U2.29 U2.53 U2.54
  other v1: 77.851,31.877 78.74,31.877 77.851,32.512 78.74,32.512 77.851,33.147 78.74,33.147
ADC_TEMP: J8.1 R55.2 TH2.1 U1.17
AN_IN: C58.1 R56.2 R57.1 U1.10
BIAS: R15.1 U2.49
BOOT0_P: R9.2 U1.60
BR_S01: U1.27 U2.25
BR_S02: U1.26 U2.26
BST_A: C31.2 U2.48
BST_B: C34.2 U2.43
BST_BK: C29.1 U2.52
BST_C: C37.2 U2.38
C_CAN_N: C45.1 D9.1 R39.1 R41.1 U3.2
C_CAN_P: C44.1 D9.2 R39.2 R40.1 U3.3
CAN_N: FL1.4 U4.6
CAN_P: FL1.3 U4.7
CAN_RX: U1.61 U4.4
CAN_TX: U1.62 U4.1
CC1: J9.A5 R65.1 U6.4
CC2: J9.B5 R64.1 U6.1
COMP: C23.2 R12.2 U2.2
CP1: C24.2 U2.14
CP2: C24.1 U2.15
DC_CAL: U1.33 U2.12 | length 11
  F.Cu w0.2: U1.33 40.446,31.81 41.148,32.512 45.974,32.512 46.812,33.35 U2.12
DTC: R13.2 U2.7
DVDD: NT1.1 U2.23
EN_GATE: U1.51 U2.16
FAULT: U1.53 U2.6
GND: C1.2 C2.2 C3.2 C4.2 C5.2 C6.2 C7.2 C8.2 C9.2 C10.2 C11.2 C12.2 C13.2 C14.2 C15.2 C16.2 C18.1 C19.1 C20.1 C21.1 C25.1 C26.1 C27.1 C28.1 C30.1 C32.1 C33.1 C35.1 C36.1 C38.1 C39.1 C40.1 C41.1 C44.2 C45.2 C46.2 C47.2 C48.2 C49.2 C50.2 C51.2 C52.2 C53.2 C54.2 C55.2 C56.2 C57.2 C58.2 C59.2 C60.2 C61.2 C62.2 CN1.1 D2.1 D5.1 D6.1 D7.2 D9.3 D10.1 D11.1 D12.1 D14.1 J1.3 J1.8 J2.3 J2.5 J3.2 J7.1 J8.2 J9.A1 J9.A12 J9.B1 J9.B12 NT7.1 NT8.1 NT9.1 R3.1 R9.1 R13.1 R14.1 R15.2 R17.1 R19.1 R21.1 R23.1 R28.1 R34.1 R38.1 R42.1 R51.1 R52.1 R53.1 R54.1 R57.2 R61.1 R62.1 R64.2 R65.2 TH2.2 U1.12 U1.18 U1.63 U2.8 U2.10 U2.28 U2.57 U3.1 U4.2 U5.1 U6.2
  other v1: 77.216,10.16 78.105,10.16 77.216,10.795 78.105,10.795 77.216,11.43 78.105,11.43 77.216,12.065 78.105,12.065 77.216,12.7 78.105,12.7 77.216,13.335 78.105,13.335 77.216,13.97 78.105,13.97 77.216,14.605 78.105,14.605 77.216,15.24 78.105,15.24 67.437,25.4 68.326,25.4 67.437,26.035 68.326,26.035 67.437,26.67 68.326,26.67 67.437,27.305 68.326,27.305 67.437,27.94 68.326,27.94 67.437,28.575 68.326,28.575 67.437,29.21 68.326,29.21 67.437,29.845 68.326,29.845 67.437,30.48 68.326,30.48 67.31,39.751 68.199,39.751 67.31,40.386 68.199,40.386 67.31,41.021 68.199,41.021 67.31,41.656 68.199,41.656 67.31,42.291 68.199,42.291 67.31,42.926 68.199,42.926 67.31,43.561 68.199,43.561 67.31,44.196 68.199,44.196 67.31,44.831 68.199,44.831
GVDD: C18.2 C20.2 U2.13
H1: U1.43 U2.17
H1_LOW: NT3.2 Q2.1 Q2.2 Q2.3 U2.44
H1_VS: C31.1 NT2.1 R22.2 U2.46
H2: U1.42 U2.19
H2_LOW: NT5.2 Q4.1 Q4.2 Q4.3 U2.39
H2_VS: C34.1 NT4.1 R20.2 U2.41
H3: U1.41 U2.21
H3_LOW: NT7.2 Q6.1 Q6.2 Q6.3 U2.34
H3_VS: C37.1 NT6.1 R16.2 U2.36
HALL_1_IN: C47.1 J7.4 R43.2 R47.1
HALL_1_OUT: R47.2 U1.58
HALL_2_IN: C48.1 J7.3 R44.2 R48.1
HALL_2_OUT: R48.2 U1.59
HALL_3_IN: C49.1 J7.2 R45.2 R49.1
HALL_3_OUT: R49.2 U1.52
L1: U1.36 U2.18
L2: U1.35 U2.20
L3: U1.34 U2.22
LED_GREEN: R2.2 U1.24
LED_RED: R4.2 U1.25
M_H1: R24.1 U2.47
M_H1_RG: Q1.4 R24.2
M_H2: R30.1 U2.42
M_H2_RG: Q3.4 R30.2
M_H3: R36.1 U2.37
M_H3_RG: Q5.4 R36.2
M_L1: R25.1 U2.45
M_L1_RG: Q2.4 R25.2 R28.2
M_L2: R31.1 U2.40
M_L2_RG: Q4.4 R31.2 R34.2
M_L3: R37.1 U2.35
M_L3_RG: Q6.4 R37.2 R38.2
MISO_ADC_EXT2: J1.7 U1.22
Net-(C22-Pad1): C22.1 C23.1
Net-(C22-Pad2): C22.2 R12.1
Net-(D2-A2): D2.2 D3.2 J1.1
Net-(D4-A): D4.2 J1.2
Net-(D5-A): D5.2 R2.1
Net-(D6-A): D6.2 R4.1
Net-(D11-A): D11.2 R58.2
Net-(D12-A): D12.2 R59.2
Net-(D13-A): C61.1 C62.1 D13.2 U5.2
Net-(D14-A): D14.2 R60.2
Net-(D15-A): D15.2 J2.1
Net-(H1-Pad1): H1.1 R51.2
Net-(H2-Pad1): H2.1 R52.2
Net-(H3-Pad1): H3.1 R53.2
Net-(H4-Pad1): H4.1 R54.2
Net-(J3-Pin_3): J3.3 R10.1
Net-(J9-SHIELD-PadS1): J9.S1 J9.S2 R61.2 R62.2
Net-(R3-Pad2): R3.2 SW1.1 SW1.2
Net-(U2-AVDD): C25.2 U2.27
Net-(U4-Rs): R42.2 U4.8
NRST: C11.1 J2.6 SW1.3 SW1.4 U1.7
OC_ADJ: C19.2 C21.2 NT1.2 U2.11
PH: C29.2 D7.1 L1.1 U2.50 U2.51
PH_0: C8.1 R5.1 Y1.2
PH_0_P: R5.2 U1.5
PH_1: C9.1 R6.1 Y1.1
PH_1_P: R6.2 U1.6
PHASE_1: J4.1 NT2.2 Q1.1 Q1.2 Q1.3 Q2.5 Q2.6 Q2.7 Q2.8 Q2.9
PHASE_2: J5.1 NT4.2 Q3.1 Q3.2 Q3.3 Q4.5 Q4.6 Q4.7 Q4.8 Q4.9
PHASE_3: J6.1 NT6.2 Q5.1 Q5.2 Q5.3 Q6.5 Q6.6 Q6.7 Q6.8 Q6.9
R_CAN_N: FL1.1 R41.2
R_CAN_P: FL1.2 R40.2
RT_CLK: R14.2 U2.1
RX_SDA_NSS: J1.5 U1.20 U1.30 U1.37
S1_N: C42.1 R26.1 U2.33
S1_P: C42.2 R27.1 U2.32
S2_N: C43.1 R32.1 U2.31
S2_P: C43.2 R33.1 U2.30
SCK_ADC_EXT: J1.4 U1.21
SENS1: R16.1 R17.2 U1.16
SENS2: R20.1 R21.2 U1.15
SENS3: R22.1 R23.2 U1.14
SERVO: C16.1 R10.2 U1.57
SH1_N: NT3.1 R26.2 R29.2
SH1_P: NT8.2 R27.2 R29.1
SH2_N: NT5.1 R32.2 R35.2
SH2_P: NT9.2 R33.2 R35.1
SWCLK: J2.4 U1.49
SWDIO: J2.2 U1.46
TEMP_IN: C50.1 J7.5 R46.2 R50.1
TEMP_MOTOR: R50.2 U1.8
TX_SCI_MOSI: U1.23 U1.29
TX_SCL_MOSI: J1.6 U1.38
unconnected-(CN1-Pad3): CN1.3
unconnected-(CN1-Pad4): CN1.4
unconnected-(J1-Pin_9-Pad9): J1.9
unconnected-(J1-Pin_10-Pad10): J1.10
unconnected-(J2-Pin_7-Pad7): J2.7
unconnected-(J2-Pin_8-Pad8): J2.8
unconnected-(J3-Pin_4-Pad4): J3.4
unconnected-(J3-Pin_5-Pad5): J3.5
unconnected-(J7-Pin_7-Pad7): J7.7
unconnected-(J7-Pin_8-Pad8): J7.8
unconnected-(J8-Pin_3-Pad3): J8.3
unconnected-(J8-Pin_4-Pad4): J8.4
unconnected-(J9-SBU1-PadA8): J9.A8
unconnected-(J9-SBU2-PadB8): J9.B8
unconnected-(U1-PA15-Pad50): U1.50
unconnected-(U1-PB2-Pad28): U1.28
unconnected-(U1-PB3-Pad55): U1.55
unconnected-(U1-PB4-Pad56): U1.56
unconnected-(U1-PC1-Pad9): U1.9
unconnected-(U1-PC3-Pad11): U1.11
unconnected-(U1-PC8-Pad39): U1.39
unconnected-(U1-PC9-Pad40): U1.40
unconnected-(U1-PC13-Pad2): U1.2
unconnected-(U1-PC14-Pad3): U1.3
unconnected-(U1-PC15-Pad4): U1.4
unconnected-(U1-PD2-Pad54): U1.54
unconnected-(U2-*OCTW-Pad5): U2.5
unconnected-(U2-EN_BUCK-Pad55): U2.55
unconnected-(U2-PWRGD-Pad4): U2.4
unconnected-(U2-SS_TR-Pad56): U2.56
unconnected-(U3-Pad5): U3.5
unconnected-(U3-Pad6): U3.6
unconnected-(U4-Vref-Pad5): U4.5
USB-C_N: J9.A7 J9.B7 R66.2 U6.6
USB-C_P: J9.A6 J9.B6 R67.2 U6.7
USB_N: R66.1 U1.44
USB_P: R67.1 U1.45
VCAP_1: C10.1 U1.31
VCAP_2: C13.1 U1.47
VSENSE: R18.1 R19.2 U2.3
pads on no net: J9.Un1 J9.Un2 U2.Un1 U2.Un2 U2.Un3 U2.Un4 U2.Un5 U2.Un6 U2.Un7 U2.Un8 U2.Un9 U2.Un10 U2.Un11 U2.Un12 U2.Un13 U2.Un14 U2.Un15
copper on no net:
  other v1: 77.851,17.145 78.74,17.145 79.629,17.145 80.518,17.145 77.851,17.78 78.74,17.78 79.629,17.78 80.518,17.78 77.851,18.415 78.74,18.415 79.629,18.415 80.518,18.415 77.851,19.05 78.74,19.05 79.629,19.05 80.518,19.05 77.851,19.685 78.74,19.685 79.629,19.685 80.518,19.685 77.851,20.32 78.74,20.32 79.629,20.32 80.518,20.32 77.851,20.955 78.74,20.955 79.629,20.955 80.518,20.955 79.629,31.877 80.518,31.877 79.629,32.512 80.518,32.512 79.629,33.147 80.518,33.147 77.851,33.782 78.74,33.782 79.629,33.782 80.518,33.782 77.851,34.417 78.74,34.417 79.629,34.417 80.518,34.417 77.851,35.052 78.74,35.052 79.629,35.052 80.518,35.052 77.851,35.687 78.74,35.687 79.629,35.687 80.518,35.687 77.851,46.863 78.74,46.863 79.629,46.863 80.518,46.863 77.851,47.498 78.74,47.498 79.629,47.498 80.518,47.498 77.851,48.133 78.74,48.133 79.629,48.133 80.518,48.133 77.851,48.768 78.74,48.768 79.629,48.768 80.518,48.768 77.851,49.403 78.74,49.403 79.629,49.403 80.518,49.403 77.851,50.038 78.74,50.038 79.629,50.038 80.518,50.038 77.851,50.673 78.74,50.673 79.629,50.673 80.518,50.673

## Polygon pours and split planes (outlines as drawn)
+VDC on F.Cu "F.Cu-+VDC" (solid, remove dead copper, pour order 1): 86.233,50.927 77.47,50.927 77.47,46.482 86.233,46.482
PHASE_1 on F.Cu "F.Cu-/MOSFETS/PHASE_1" (solid, remove dead copper, pour order 0): 99.949,50.8 89.789,50.8 88.773,49.911 87.122,49.911 87.122,46.609 86.36,45.847 84.201,45.847 83.439,45.212 83.439,41.148 83.947,40.513 99.949,40.513

## Keep-outs
Edge.Cuts:
  lines w0: 95,75 cw(c95,70) 100,70 ; 95,75 cw(c95,70) 100,70 ; 95,75 100,70 ; 95,75 5,75 ccw(c5,70) 0,70 0,5 ccw(c5,5) 5,0 95,0 ccw(c95,5) 100,5 100,70
  lines w0.254: 95,75 cw(c95,70) 100,70 ; 95,75 cw(c95,70) 100,70 ; 95,75 5,75 ccw(c5,70) 0,70 0,5 ccw(c5,5) 5,0 95,0 ccw(c95,5) 100,5 100,70

## Other copper
F.Cu:
  region: 99.822,25.273 83.947,25.146 83.566,25.654 83.566,29.845 84.201,30.226 86.233,30.226 86.995,30.988 86.995,34.417 88.519,34.417 88.9,34.671 90.424,35.814 99.822,35.814
  region: 99.822,10.795 83.947,10.668 83.566,11.176 83.566,15.367 84.201,15.748 86.233,15.748 86.995,16.51 86.995,19.939 88.519,19.939 88.9,20.193 90.424,21.336 99.822,21.336
B.Cu:
  region: 86.36,59.563 86.36,16.51 85.852,16.002 77.597,16.002 76.962,16.637 76.962,54.61 78.994,56.642 78.994,60.452 80.264,61.722 84.201,61.722

## Silkscreen, mask and mechanical layers (free items; w line width, h text height)
Dwgs.User:
  lines w0.254: -88,54.5 -88,55 ; 0,5 0,70 ; 100,5 100,70 ; 262.22,-113.896 385.549,-113.896 ; 262.22,-110.29 385.549,-110.29 ; 262.22,-106.684 385.549,-106.684 ; 262.22,-103.078 385.549,-103.078 ; 262.22,-99.472 385.549,-99.472 ; 262.22,-95.866 385.549,-95.866 ; 262.22,-92.26 385.549,-92.26 ; 262.22,-88.654 385.549,-88.654 ; 262.22,-85.048 385.549,-85.048 ; 277.606,-117.502 277.606,-80.74 ; 302.677,-117.502 302.677,-80.74 ; 319.177,-117.502 319.177,-80.74 ; 339.206,-117.502 339.206,-80.74 ; 355.706,-117.502 355.706,-80.74 ; 368.591,-117.502 368.591,-80.74 ; 5,75 95,75 ; 5,75 95,75 ; 5,75 95,75 ; 5,0 95,0 5,0 ; 262.22,-117.502 262.22,-80.74 385.549,-80.74 385.549,-117.502 262.22,-117.502
  text "${TITLE}" at -5.56,120.482 h10
  text "${ISSUE_DATE}" at 192.56,114.812 h5
  text "Extend PCB edge 0.5mm if using SMT header" at -85,69.618 h1
  text "BOARD CHARACTERISTICS" at 262.22,-45.749 h2
  text "2" at 295.627,-51.094 h1.5
  text "Board Thickness:" at 329.784,-51.103 h1.5
  text "1.6000 mm" at 354.727,-51.101 h1.5
  text "Copper Layer Count:" at 262.97,-51.247 h1.5
  text "Board overall dimensions:" at 262.97,-55.06 h1.5
  text "65.0000 mm x 56.0000 mm" at 295.627,-55.058 h1.5
  text "String" at 329.784,-55.204 h1.5
  text "String" at 354.727,-55.204 h1.5
  text "0.2000 mm / 0.0000 mm" at 295.627,-59.015 h1.5
  text "Min hole diameter:" at 329.784,-59.017 h1.5
  text "0.3000 mm" at 354.727,-59.015 h1.5
  text "Min track/spacing:" at 262.97,-59.161 h1.5
  text "None" at 295.627,-62.968 h1.5
  text "No" at 354.727,-62.968 h1.5
  text "Copper Finish:" at 262.97,-63.114 h1.5
  text "Impedance Control:" at 329.784,-63.114 h1.5
  text "No" at 295.627,-66.925 h1.5
  text "No" at 354.727,-66.925 h1.5
  text "Plated Board Edge:" at 329.784,-67.07 h1.5
  text "Castellated pads:" at 262.97,-67.071 h1.5
  text "No" at 295.627,-70.882 h1.5
  text "Edge card connectors:" at 262.97,-71.027 h1.5
  text "Material" at 303.427,-81.919 h1.5
  text "Color" at 339.956,-81.919 h1.5
  text "Layer Name" at 262.97,-82.057 h1.5
  text "Type" at 278.356,-82.057 h1.5
  text "Thickness (mm)" at 319.927,-82.063 h1.5
  text "Epsilon R" at 356.456,-82.059 h1.5
  text "Loss Tangent" at 369.341,-82.058 h1.5
  text "1" at 356.456,-86.213 h1.5
  text "F.Silkscreen" at 262.97,-86.227 h1.5
  text "0 mm" at 319.927,-86.225 h1.5
  text "0" at 369.341,-86.225 h1.5
  text "Top Silk Screen" at 278.356,-86.367 h1.5
  text "Not specified" at 303.427,-86.367 h1.5
  text "Not specified" at 339.956,-86.367 h1.5
  text "F.Paste" at 262.97,-89.827 h1.5
  text "1" at 356.456,-89.819 h1.5
  text "0 mm" at 319.927,-89.831 h1.5
  text "0" at 369.341,-89.831 h1.5
  text "Top Solder Paste" at 278.356,-89.973 h1.5
  text "String" at 303.427,-89.977 h1.5
  text "String" at 339.956,-89.977 h1.5
  text "F.Mask" at 262.97,-93.433 h1.5
  text "0.01 mm" at 319.927,-93.437 h1.5
  text "Green" at 339.956,-93.439 h1.5
  text "3.3" at 356.456,-93.437 h1.5
  text "0" at 369.341,-93.437 h1.5
  text "Top Solder Mask" at 278.356,-93.579 h1.5
  text "Not specified" at 303.427,-93.579 h1.5
  text "1" at 356.456,-97.031 h1.5
  text "F.Cu" at 262.97,-97.042 h1.5
  text "copper" at 278.356,-97.047 h1.5
  text "0.035 mm" at 319.927,-97.043 h1.5
  text "0" at 369.341,-97.043 h1.5
  text "String" at 303.427,-97.189 h1.5
  text "String" at 339.956,-97.189 h1.5
  text "core" at 278.356,-100.513 h1.5
  text "FR4" at 303.427,-100.642 h1.5
  text "1.51 mm" at 319.927,-100.645 h1.5
  text "Dielectric" at 262.97,-100.651 h1.5
  text "4.5" at 356.456,-100.649 h1.5
  text "0.02" at 369.341,-100.649 h1.5
  text "Not specified" at 339.956,-100.791 h1.5
  text "B.Cu" at 262.97,-104.254 h1.5
  text "0.035 mm" at 319.927,-104.255 h1.5
  text "1" at 356.456,-104.243 h1.5
  text "0" at 369.341,-104.255 h1.5
  text "copper" at 278.356,-104.259 h1.5
  text "String" at 303.427,-104.401 h1.5
  text "String" at 339.956,-104.401 h1.5
  text "B.Mask" at 262.97,-107.857 h1.5
  text "Bottom Solder Mask" at 278.356,-107.863 h1.5
  text "0.01 mm" at 319.927,-107.861 h1.5
  text "Green" at 339.956,-107.863 h1.5
  text "3.3" at 356.456,-107.861 h1.5
  text "0" at 369.341,-107.861 h1.5
  text "Not specified" at 303.427,-108.003 h1.5
  text "B.Paste" at 262.97,-111.463 h1.5
  text "Bottom Solder Paste" at 278.356,-111.469 h1.5
  text "0 mm" at 319.927,-111.467 h1.5
  text "1" at 356.456,-111.455 h1.5
  text "0" at 369.341,-111.467 h1.5
  text "String" at 303.427,-111.613 h1.5
  text "String" at 339.956,-111.613 h1.5
  text "B.Silkscreen" at 262.97,-115.075 h1.5
  text "Bottom Silk Screen" at 278.356,-115.075 h1.5
  text "0 mm" at 319.927,-115.073 h1.5
  text "1" at 356.456,-115.061 h1.5
  text "0" at 369.341,-115.073 h1.5
  text "Not specified" at 303.427,-115.215 h1.5
  text "Not specified" at 339.956,-115.215 h1.5

## Text inside footprints (layer, text, board x,y; h text height)
C12: F.Fab "REF**" at 73.656,39.395 h1
C56: B.Fab "REF**" at 77.021,48.07 h1
C57: B.Fab "REF**" at 73.973,12.256 h1
CN1: F.Fab "REF**" at 67.27,65.346 h1 r90; B.Mask "-" at 72.678,61.309 h1 r90; B.Mask "+" at 83.889,60.934 h1 r90
FL1: F.Fab "REF**" at 25.717,47.772 h1
J1: F.Fab "REF**" at -3.04,29.786 h1 r90
J2: F.Fab "REF**" at 35.374,78.384 h1
J3: F.Fab "REF**" at 17.224,61.135 h1
J7: F.Fab "REF**" at 34.866,-3.76 h1
J8: F.Fab "REF**" at 17.086,13.332 h1
J9: F.Fab "REF**" at 55.694,78.624 h1
L1: F.Fab "REF**" at 67.51,47.566 h1 r90
Q1: F.Fab "REF**" at 92.344,48.029 h1 r90
Q2: F.Fab "REF**" at 78.345,42.486 h1 r90
Q3: F.Fab "REF**" at 92.344,32.834 h1 r90
Q4: F.Fab "REF**" at 78.345,27.627 h1 r90
Q5: F.Fab "REF**" at 92.344,17.975 h1 r90
Q6: F.Fab "REF**" at 78.345,12.641 h1 r90
R29: F.Fab "REF**" at 74.49,33.757 h1
R35: F.Fab "REF**" at 74.738,19.097 h1
SW1: F.Fab "REF**" at 18.864,36.3 h1
U3: F.Fab "REF**" at -3.24,55.186 h1 r90
U6: F.Fab "REF**" at 55.694,60.677 h1
Y1: F.Fab "REF**" at 23.91,36.136 h1 r90